# Altium PCB PCB1.PcbDoc
Units mil, origin at the board's own origin, x right, y up, seen from the top; angles counter-clockwise.
Board outline 4240 x 4000 mil, 2 copper layers (Top Layer, Bottom Layer); 21 components, 22 nets, 103 pads, 0 vias.
Unrouted connection lines stored in the file: 1.
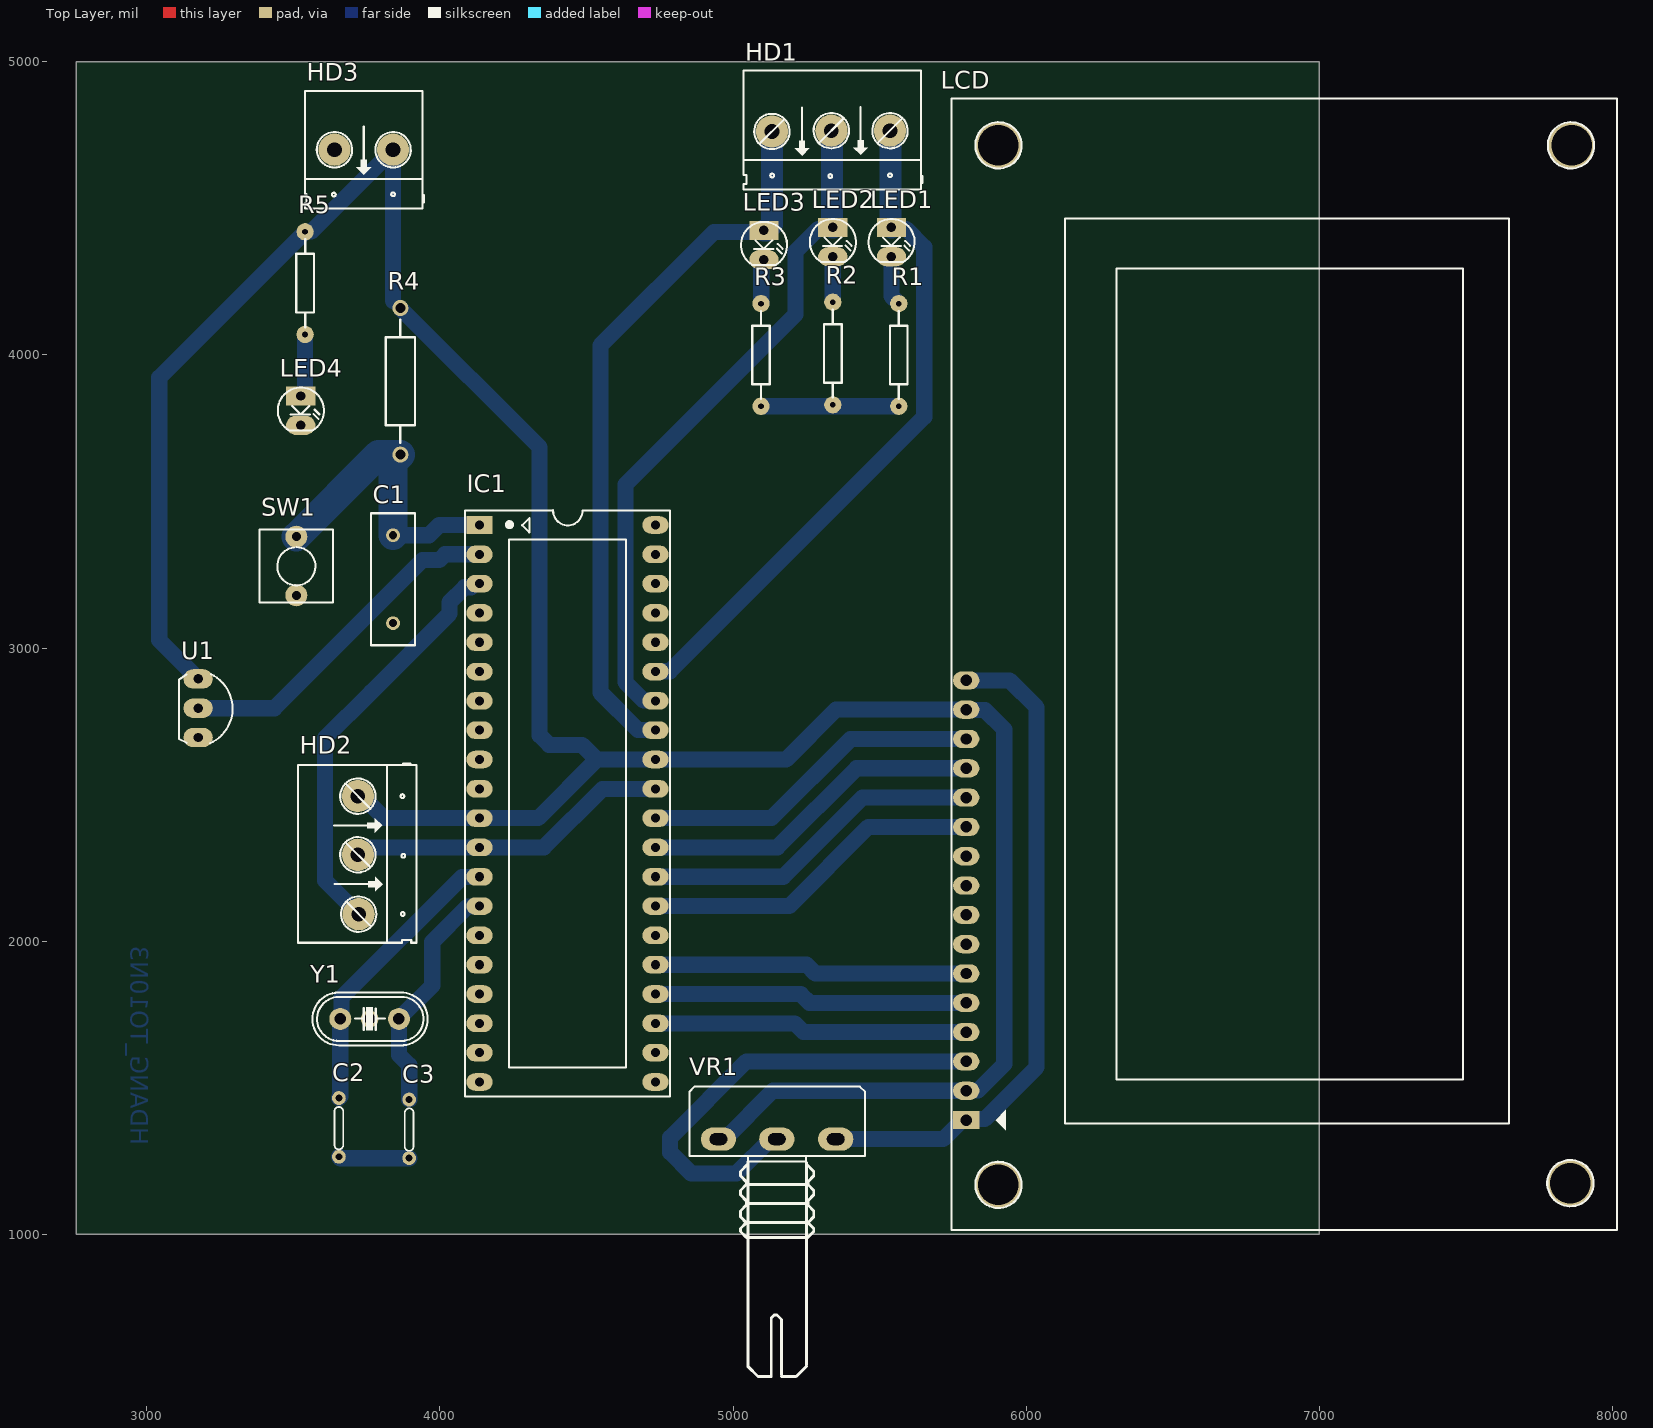
[diagram p0: Top Layer view]
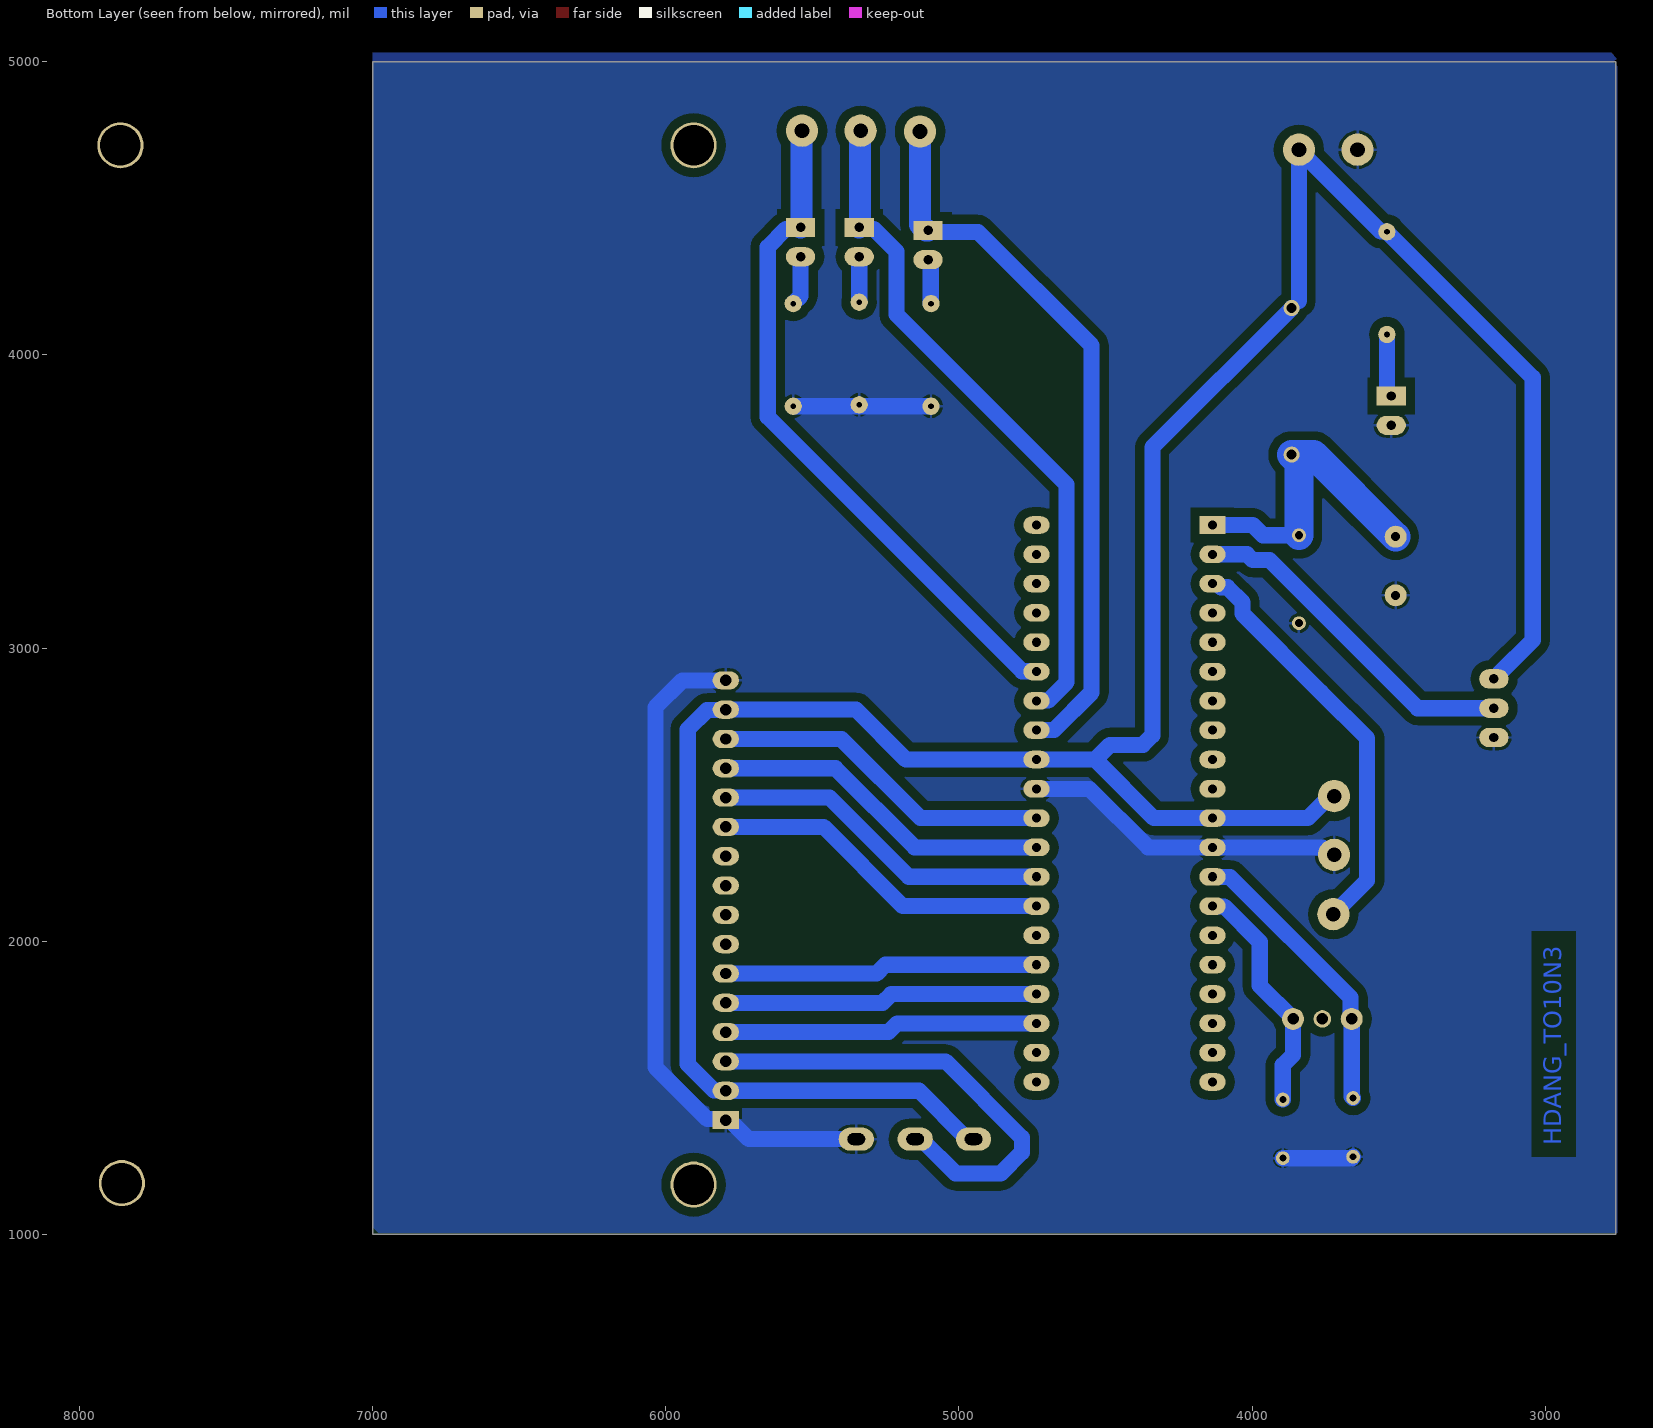
[diagram p1: Bottom Layer view, seen from below]
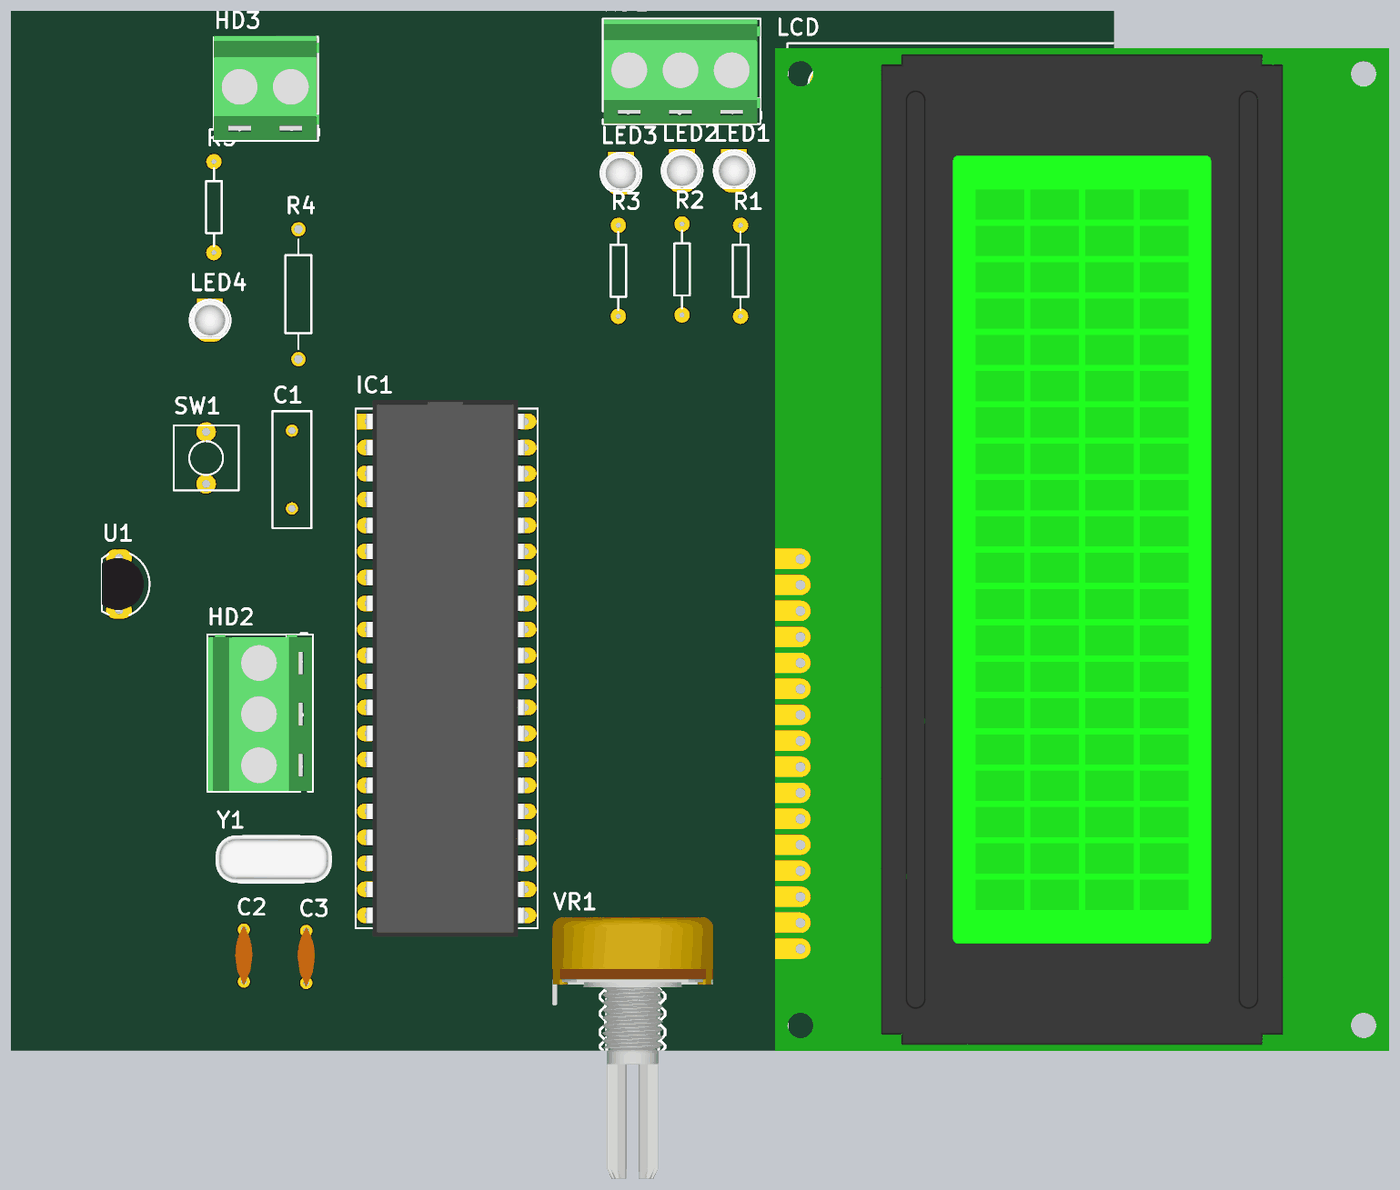
[diagram p2: 3D render of the assembled board from above, using the file's embedded part models]

## Layer stack, top to bottom
Top Solder: solder mask 0.4, Solder Resist, Dk 3.5
Top Layer: signal copper 1.4
Dielectric 1: dielectric 12.6, FR-4, Dk 4.8
Bottom Layer: signal copper 1.4
Bottom Solder: solder mask 0.4, Solder Resist, Dk 3.5

## Board outline
2760,1000 7000,1000 7000,5000 2760,5000

## Design rules (kind name [scope] priority, off if disabled: settings)
Clearance [All] p1: gap=30 ignorepadtopadclearanceinfootprint=FALSE
PolygonConnect [All] p1: connectstyle=Relief reliefconductorwidth=10 reliefentries=4 polygonreliefangle="90 Angle" airgapwidth=10
RoutingVias [All] p1: holewidth=28 width=50 viastyle="Through Hole" minholewidth=28 minwidth=50 maxholewidth=28 maxwidth=50
SolderMaskExpansion [All] p1: expansion=4 istentingtop=FALSE
Width [All] p1: maxlimit=100 minlimit=10 preferedwidth=75 toplayer_maxwidth=10 toplayer_prefwidth=10 bottomlayer_minwidth=55 minimp=50.000000 maximp=50.000000 favimp=50.000000
30 further rules are at their usual default settings.

## Components (designator, comment, footprint, x,y, rotation, side; value= is the part's Value field where it differs from the comment)
C1 "Cap" RAD-0.3 3840,3235 r90 top value=100pF
C2 "Capacitor Ceramic" Tu-ceramic 3655,1265 r90 top value=33p
C3 "Capacitor Ceramic" Tu-ceramic 3895,1260 r90 top value=33p
HD1 "Header 3" HED3 5535,4765 r180 top
HD2 "Header 3" HED3 3720,2495 r270 top
HD3 "Header 2" HED2 3840,4700 r180 top
IC1 "PIC 16F877A" DIP40/W0.6 4135,3420 r270 top value=PIC16F877A
LCD "LCD 20x4A" LCD20X4A 5795,1390 r90 top
LED1 "LED" LED-3 5540,4435 r270 top value="LED 3 ly Single Colour"
LED2 "LED" LED-3 5340,4435 r270 top value="LED 3 ly Single Colour"
LED3 "LED" LED-3 5105,4425 r270 top value="LED 3 ly Single Colour"
LED4 "LED" LED-3 3525,3860 r270 top value="LED 3 ly Single Colour"
R1 "1k" R1/6W 5565,4000 r90 top value="R1/4W - 1K"
R2 "1k" R1/6W 5340,4005 r90 top value="R1/4W - 1K"
R3 "1k" R1/6W 5095,4000 r90 top value="R1/4W - 1K"
R4 "10k" AXIAL-0.5 3865,3910 r270 top value="R1/4W - 1K"
R5 "1k" R1/6W 3540,4245 r90 top value="R1/4W - 1K"
SW1 "SW" SW2 3510,3180 r90 top value="SW chip 2 pin"
U1 "LM35" TO92-123 3175,2795 r270 top
VR1 "50K" VR-S1 5150,1325 r0 top value="Volume 50k"
Y1 "20MHz" XT2 3760,1735 r180 top

## Footprints (in the part's own frame and the unit in brackets; to place one, negate y for a bottom-side part, rotate by r counter-clockwise, add the part's x,y. Pads: shape width x height; smd on the part's side, far side on the other; paste and mask are expansions set on the pad)
AXIAL-0.5 [mm] "Axial Device, Thru-Hole; 2 Leads; 0.5 in Pin Spacing"
  round 1.4 hole 0.85: 1(-6.35,0) 2(6.35,0)
  silkscreen extent -5.33,-1.27 5.33,1.27
DIP40/W0.6 [mil] "40 PIN, W 600mil, Pin to pin 100mil"
  rect 60x90 hole 31: 1(0,0)
  oval 60x90 hole 31: 2(100,0) 3(200,0) 4(300,0) 5(400,0) 6(500,0) 7(600,0) 8(700,0) 9(800,0) 10(900,0) 11(1000,0) 12(1100,0) 13(1200,0) 14(1300,0) 15(1400,0) 16(1500,0) 17(1600,0) 18(1700,0) 19(1800,0) 20(1900,0) 21(1900,600) 22(1800,600) 23(1700,600) 24(1600,600) 25(1500,600) 26(1400,600) 27(1300,600) 28(1200,600) 29(1100,600) 30(1000,600) 31(900,600) 32(800,600) 33(700,600) 34(600,600) 35(500,600) 36(400,600) 37(300,600) 38(200,600) 39(100,600) 40(0,600)
  silkscreen extent -50,-50 1950,650, body extent -82,-10 1982,600, height 224
HED2 [mil] "Header 2, 2 pin, hight 300mil, Pin to Pin 200, Colour Green"
  round 110 hole 50: 1(0,0) 2(200,0)
  silkscreen extent -106,-201 300,200, body extent -106,-205 300,197, height 560
HED3 [mil] "Header 3, 3 pin, hight 300mil, Pin to Pin 200, Colour Green"
  round 110 hole 50: 1(0,0) 2(200,0) 3(402.62,2.62)
  silkscreen extent -111,-205 500,200, body extent -106,-204 496,198, height 560
LCD20X4A [mil] "LCD dipslay 20x4, 16 pin"
  rect 62x90 hole 39: 1(0,0)
  oval 62x90 hole 39: 2(100,0) 3(200,0) 4(300,0) 5(400,0) 6(500,0) 7(600,0) 8(700,0) 9(800,0) 10(900,0) 11(1000,0) 12(1100,0) 13(1200,0) 14(1300,0) 15(1400,0) 16(1500,0)
  round 157.48 hole 137.8: "Hole 0"(-220,-110) "Hole 0"(-215,-2060) "Hole 0"(3325,-2065) "Hole 0"(3325,-110)
  silkscreen extent -375,-2220 3485,50, body extent -392,-2264 3466,98, height 417
LED-3 [mil] "LED 2 PIN, 3ly Only colour"
  rect 65x100 hole 32: 1(0,0)
  oval 65x100 hole 32: 2(100,0)
  silkscreen extent -29,-78 118,79, body extent -25,-75 113,75, height 217
R1/6W [mm]
  round 1.5 hole 0.5: 1(-4.445,0) 2(4.445,0)
  silkscreen extent -3.81,-0.76 3.81,0.76
RAD-0.3 [mm] "Radial Cap, Thru-Hole; 2 Leads; 0.3 in Pin Spacing"
  round 1.2 hole 0.7: 1(-3.81,0) 2(3.81,0)
  silkscreen extent -5.71,-1.91 5.71,1.91
SW2 [mil] "SW button 2pin, 250x 250 mil"
  round 75 hole 31: 1(0,0) 2(200,0)
  silkscreen extent -25,-125 225,125
TO92-123 [mil] "TO-92"
  oval 66x100 hole 32: 1(-100,0) 2(0,0) 3(100,0)
  silkscreen extent -117,-65 120,118, body extent -109,-66 109,95, height 245
Tu-ceramic [mm] "Tu gom mini"
  round 1.2 hole 0.6: 1(0,0) 2(5.08,0)
  silkscreen extent 0.64,-0.38 4.32,0.38, body extent -0.38,-0.85 5.46,0.85, height 6.12
VR-S1 [mil]
  oval 120x78.74 hole 40 slot 60 at 0 deg: 1(-200,0) 2(-1,0) 3(200,0)
  silkscreen extent -299,-810 300,179, body extent -310,-818 310,188, height 839
XT2 [mm] "Footpin for Crystal 2 pin"
  round 1.524 hole 1: 0(0,0)
  round 1.905 hole 1: 1(-2.54,0) 2(2.54,0)
  silkscreen extent -5.03,-2.29 4.96,2.29, body extent -5.93,-2.36 5.42,2.29, height 3.5

## Part data
C1: "Capacitor", LatestRevisionDate=17-Jul-2002, LatestRevisionNote="Re-released for DXP Platform.", PackageDescription="Radial Cap, Thru-Hole; 2 Leads; 0.3 in Pin Spacing", PackageReference=RAD-0.3, Published=8-Jun-2000, Publisher="Altium Limited"
C2 C3: library part CapDecop, "Capacitor", LatestRevisionDate=17-Jul-2002, LatestRevisionNote="Re-released for DXP Platform.", PackageReference=RAD-0.3, Published=8-Jun-2000, Publisher="Altium Limited"
HD1 HD2: library part Hed3, "Header 3 (Green)"
HD3: library part Hed2, "Header 2 (Green)"
IC1: library part PIC16F877-PU, "8K FLASH, 368B RAM, 256B EFROM", Copyright by=VanDungEvn
LCD: library part LCD20x4A, "LCD dipslay 20 char, 4 line"
LED1 LED2 LED3 LED4: "LED Single colour Green and Red"
R1 R2 R3 R5: library part Res, "Resistor 1/4W"
R4: library part R, "Resistor 1/4W"
SW1: library part SW2, "Switch button 2 pin"
U1: "Teminal"
VR1: library part VR-S, "Var Resistor"
Y1: library part Crystal, "Crystal Oscillator", LatestRevisionDate=17-Jul-2002, LatestRevisionNote="Re-released for DXP Platform.", PackageReference=R38, Published=8-Jun-2000, Publisher="Altium Limited"

## Nets (pads, with @x,y where several pads share a name; then routed paths per layer and width w, separated by ;. In a path a pad name is that pad's centre, name@x,y a point inside that pad or via, vN(x,y) a via of type N, cw(c..) or ccw(c..) an arc to the next point about the centre after c; other vN are vias at no path point)
GND: C1.1 C2.1 C3.1 HD2.2 HD3.2 IC1.12 IC1.31 LCD.1 LCD.16 LED4.2 R1.1 R2.1 R3.1 SW1.1 U1.3 VR1.3 | length 4112.4
  Bottom Layer w55: C2.1 3660,1260 C3.1 ; HD2.2 3734.88,2295 3759.88,2320 IC1.12 4354.73,2320 4554.73,2520 IC1.31 ; R3.1 R1.1 ; VR1.3 5716,1325 5781,1390 LCD.1 5798.5,1393.5 5857.87,1393.5 6035,1570.63 6035,2797.78 5942.78,2890 LCD.16
NetC1_2: C1.2 IC1.1 R4.2 SW1.2 | length 1065.8
  Bottom Layer w55: C1.2 3962.5,3385 3997.5,3420 IC1.1
  Bottom Layer w100: SW1.2 3790,3660 R4.2 3840,3635 C1.2
NetC2_2: C2.2 IC1.13 Y1.2 | length 988.4
  Bottom Layer w55: C2.2 3660,1470 Y1.2 3663.83,1738.83 3663.83,1807.78 4075.09,2219.04 4134.04,2219.04 IC1.13
NetC3_2: C3.2 IC1.14 Y1.1 | length 811.1
  Bottom Layer w55: C3.2 3895,1577.29 3860,1612.29 Y1.1 3973.79,1848.79 3973.79,1997.54 4095.3,2119.04 4134.04,2119.04 IC1.14
NetHD1_1: HD1.1 IC1.35 LED1.1 | length 2327.7
  Bottom Layer w55: IC1.35 4735.96,2920.96 4784.03,2920.96 5652.03,3788.95 5652.03,4367.75 5589.78,4430 5545,4430 LED1.1
  Bottom Layer w75: HD1.1 5537.5,4762.5 5537.5,4437.5 LED1.1
NetHD1_2: HD1.2 IC1.34 LED2.1 | length 2331.5
  Bottom Layer w55: IC1.34 4734.04,2820.96 4695.3,2820.96 4632.5,2883.76 4632.5,3557.5 5212.5,4137.5 5212.5,4352.28 5290.22,4430 5335,4430 LED2.1
  Bottom Layer w75: HD1.2 5337.5,4762.5 5337.5,4437.5 LED2.1
NetHD1_3: HD1.3 IC1.33 LED3.1 | length 2497.9
  Bottom Layer w55: IC1.33 4734.04,2720.96 4675.09,2720.96 4547.5,2848.55 4547.5,4032.5 4935,4420 5100,4420 LED3.1
  Bottom Layer w75: LED3.1 5112.5,4425 5132.38,4444.88 HD1.3
NetHD2_3: HD2.3 IC1.3 | length 1416.5
  Bottom Layer w55: HD2.3 3607.5,2207.5 3607.5,2692.5 3765,2850 4032.5,3117.5 4032.5,3156.24 4083.76,3207.5 4106.15,3207.5 4118.65,3220 IC1.3
NetIC1_2: IC1.2 U1.2 | length 1177.5
  Bottom Layer w55: U1.2 3435.28,2795 3940.28,3300 3997.71,3300 4017.71,3320 IC1.2
NetIC1_23: IC1.23 LCD.4 | length 1072.4
  Bottom Layer w55: IC1.23 5210.29,1720 5240.29,1690 LCD.4
NetIC1_24: IC1.24 LCD.5 | length 1072.4
  Bottom Layer w55: IC1.24 5230.5,1820 5260.5,1790 LCD.5
NetIC1_25: IC1.25 LCD.6 | length 1072.4
  Bottom Layer w55: IC1.25 5250.71,1920 5280.71,1890 LCD.6
NetIC1_27: IC1.27 LCD.11 | length 1171.8
  Bottom Layer w55: IC1.27 5191.33,2120 5461.33,2390 LCD.11
NetIC1_28: IC1.28 LCD.12 | length 1171.8
  Bottom Layer w55: IC1.28 5171.12,2220 5441.12,2490 LCD.12
NetIC1_29: IC1.29 LCD.13 | length 1171.8
  Bottom Layer w55: IC1.29 5150.92,2320 5420.92,2590 LCD.13
NetIC1_30: IC1.30 LCD.14 | length 1171.8
  Bottom Layer w55: IC1.30 5130.71,2420 5400.71,2690 LCD.14
NetLCD_3: LCD.3 VR1.2 | length 1617.2
  Top Layer w10: LCD.3@5790,1585 LCD.3
  Bottom Layer w55: VR1.2 5128.37,1325 5011.15,1207.78 4857.22,1207.78 4785,1280 4785,1330 5045,1590 LCD.3
NetLED1_2: LED1.2 R1.2 | length 170.4
  Bottom Layer w55: LED1.2 5540,4201.1 5565,4176.1 R1.2
NetLED2_2: LED2.2 R2.2 | length 155
  Bottom Layer w55: R2.2 LED2.2
NetLED3_2: LED3.2 R3.2 | length 156.8
  Bottom Layer w55: R3.2 5095.78,4175.78 5095.78,4320.38 5100.4,4325 LED3.2
NetLED4_1: LED4.1 R5.1 | length 221.6
  Bottom Layer w55: LED4.1 3534.22,3860 3539.22,3865 3539.22,4069.22 R5.1
VCC: HD2.1 HD3.1 IC1.11 IC1.32 LCD.2 LCD.15 R4.1 R5.2 U1.1 VR1.1 | length 9248.3
  Bottom Layer w55: U1.1 3160.98,2895 3155.9,2900.08 3155.9,2914.1 3042.5,3027.5 3042.5,3922.5 R5.2 3540.78,4420.78 3560.78,4420.78 HD3.1 3840,4185.03 ; HD2.1 3734.88,2495 3809.88,2420 IC1.11 4334.52,2420 4534.52,2620 ; R4.1 4340,3685 4340,2702.22 4372.22,2670 4484.52,2670 4534.52,2620 ; VR1.1 4970.63,1325 5135.63,1490 LCD.2 5796.34,1491.34 5835.5,1491.34 5925,1580.84 5925,2722.78 5859.12,2788.66 5796.34,2788.66 LCD.15 5350.71,2790 5180.71,2620 IC1.32 4534.52,2620
pads on no net: "LCD.Hole 0" IC1.4 IC1.5 IC1.6 IC1.7 IC1.8 IC1.9 IC1.10 IC1.15 IC1.16 IC1.17 IC1.18 IC1.19 IC1.20 IC1.21 IC1.22 IC1.26 IC1.36 IC1.37 IC1.38 IC1.39 IC1.40 LCD.7 LCD.8 LCD.9 LCD.10 Y1.0

## Polygon pours and split planes (outlines as drawn)
GND on Bottom Layer "GND_L02_P000" (solid, remove dead copper, pour order 0): 2755,5010 2775,5030 7000,5030 7000,1025 6980,1005 2755,1005 2755,4985 2770,5000

## Other copper
Bottom Layer:
  text "HDANG_TO10N3" at 2945,1305 h60 r270

## Silkscreen, mask and mechanical layers (free items; w line width, h text height)
Mechanical 1:
  the board outline again, w47.24